# Altium PCB USB_Sniffer.PcbDoc (part 2 of 2)
Units mm, origin at the board's own origin, x right, y up, seen from the top; angles counter-clockwise.
Board outline 50 x 42 mm, 4 copper layers (Top Layer, Int1 (GND), Int2 (GND), Bottom Layer), stack 1.564 mm thick; 83 components, 92 nets, 421 pads, 171 vias.
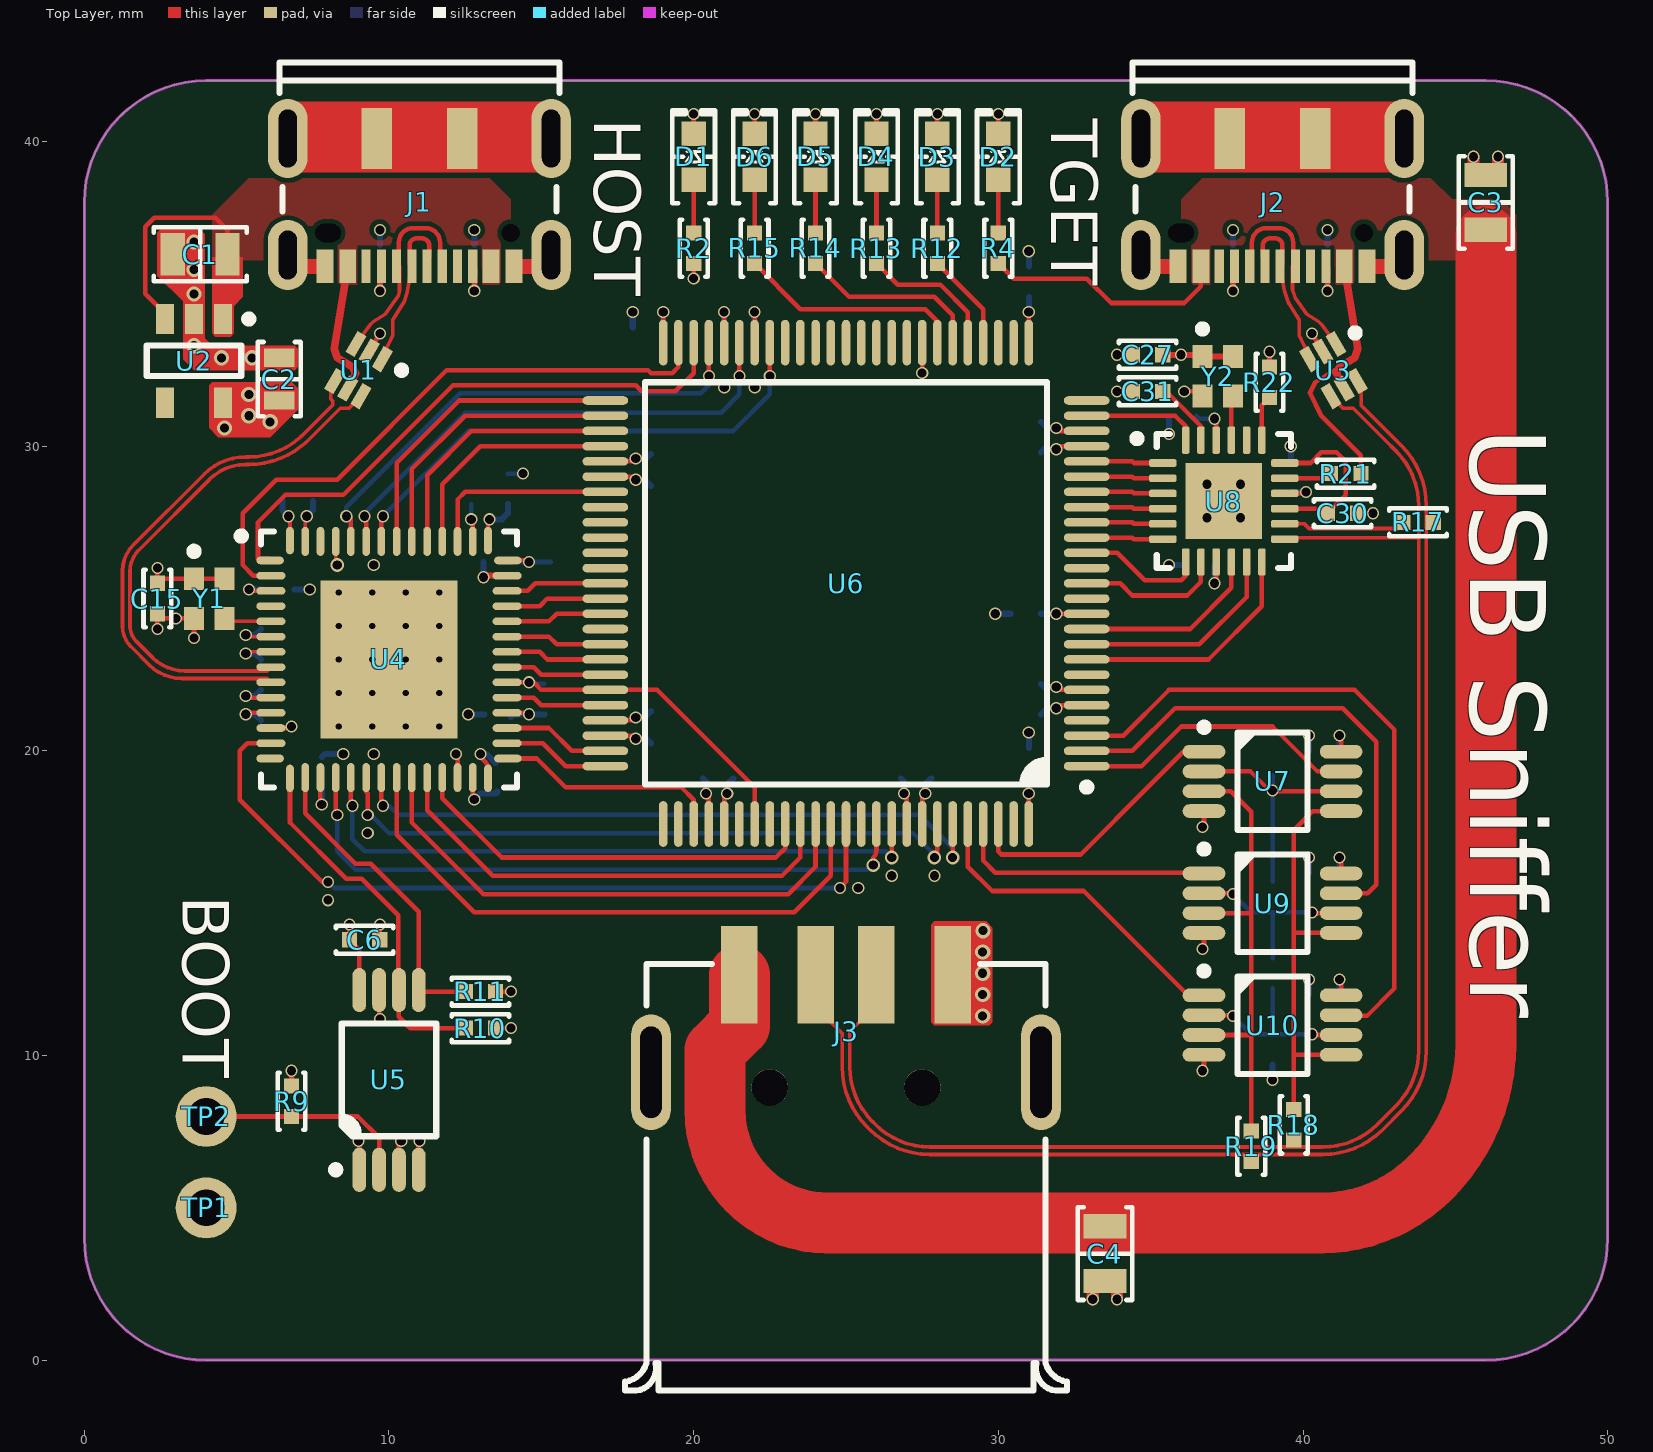
[diagram p0: Top Layer view]

## Via types
v1: diameter 0.4, hole 0.3, Top Layer to Bottom Layer, tented both sides, 127 vias
v2: diameter 0.5, hole 0.2, Top Layer to Bottom Layer, 20 vias
v3: diameter 0.5, hole 0.3, Top Layer to Bottom Layer, tented both sides, 15 vias
v4: diameter 0.45, hole 0.3, Top Layer to Bottom Layer, tented both sides, 5 vias
v5: diameter 0.6, hole 0.3, Top Layer to Bottom Layer, 4 vias

## Nets (pads, with @x,y where several pads share a name; then routed paths per layer and width w, separated by ;. In a path a pad name is that pad's centre, name@x,y a point inside that pad or via, vN(x,y) a via of type N, cw(c..) or ccw(c..) an arc to the next point about the centre after c; other vN are vias at no path point) (continued)
VBUS_T: (continued)
  Top Layer w0.15: R4.1 30.5,35.5 32.9,35.5 33.7,34.7 36.1,34.7 36.65,35.25 J2.11 ; 41.038,32.499 40.4,32.1 40.225,31.75 40.6,31 41.9,29.7 R21.1
  Top Layer w0.25: U3.5 41.1,32.4 41.2,32.6 41.7,32.9 41.8,33.2 J2.2
  Top Layer w2: J3.1 21.5,10.975 20.7,10.175 20.7,8.2 ccw(c24.4,8.2) 24.4,4.5 40.569,4.5 ccw(c40.569,9.619) 44.188,5.999 ccw(c39.815,10.373) 46,10.373 C3.2@46,36.9
pads on no net: J1.4 J1.10 J1.M J2.4 J2.10 J2.M J3.MH1 J3.MH2 U2.4 U4.4 U4.14 U4.54 U6.4 U6.7 U6.12 U6.14 U6.25 U6.27 U6.28 U6.34 U6.35 U6.36 U6.37 U6.38 U6.39 U6.40 U6.41 U6.42 U6.58 U6.59 U6.60 U6.61 U6.62 U6.66 U6.76 U6.77 U6.81 U6.83 U6.89 U6.99 U8.20

## Polygon pours and split planes (outlines as drawn)
GND on Int1 (GND) "GND_L02_P000" (solid, remove dead copper, pour order 0): 0,42 0,0 50,0 50,42
GND on Int2 (GND) "GND_L03_P001" (solid, remove dead copper, pour order 1): 0,42 0,0 50,0 50,42
VBUS_T on Top Layer "VBUS_T_L01_P003" (solid, pour order 3): 41.6,35.3 42.4,36.1 46.6,36.1 47,36.5 47,37.6 46.5,38.1 44.9,38.1 44.2,38.8 36.7,38.8 36,38.1 36,35.7 36.4,35.3
VBUS_H on Top Layer "VBUS_H_L01_P002" (solid, pour order 2): 8.4,35.3 7.6,36.1 4.2,36.1 4.2,37.6 5.4,38.8 13.3,38.8 14,38.1 14,35.7 13.6,35.3
3.3V on Bottom Layer "3.3V_L04_P004" (solid, remove dead copper, pour order 4): 1,37 1,5 ccw(c5,5) 5,1 45,1 ccw(c45,5) 49,5 49,37 ccw(c45,37) 45,41 5,41 ccw(c5,37)

## Keep-outs
Keep-Out Layer:
  the board outline again, w0.1

## Other copper
Top Layer:
  region net GND: 34.7,41.3 43.3,41.3 43.3,39 34.7,39
  region net GND: 6.7,41.3 15.3,41.3 15.3,39 6.7,39
  region net GND: 27.9,14.4 27.8,14.3 27.8,11.1 27.9,11 29.7,11 29.8,11.1 29.8,14.2 29.6,14.4
  region net 3.3V: 4.1,32 4.2,32.1 6.8,32.1 7,31.9 7,31.2 6.1,30.3 4.4,30.3 4.1,30.6
  region net GND: 2.5,37.1 2.4,37 2.4,35.6 3.25,34.75 3.25,32.85 3.6,32.5 6.9,32.5 7,32.6 7,33.2 6.9,33.3 4.2,33.3 3.95,33.55 3.95,36.95 3.8,37.1
  region net VBUS_H: 4.2,36.2 5.2,36.2 5.2,34.9 4.9,34.6 4.9,33.7 4.8,33.6 4.3,33.6 4.2,33.7
Int1 (GND):
  pour cut-out: 42,18.275 42,17.775 40.375,17.775 39.9,17.3 39.9,14.35 39.975,14.275 42,14.275 42,13.775 39.95,13.775 39.9,13.725 39.9,10.35 39.975,10.275 42,10.275 42,9.775 39.95,9.775 39.9,9.725 39.9,8.7 40,8.6 40,7.925 39.4,7.925 39.4,8.625 39.5,8.725 39.5,17.5 40.275,18.275
  pour cut-out: 36,18.925 36,18.425 37.575,18.425 38.1,17.9 38.1,15 38.025,14.925 36,14.925 36,14.425 38.05,14.425 38.1,14.375 38.1,11 38.025,10.925 36,10.925 36,10.425 38.05,10.425 38.1,10.375 38.1,8 38,7.9 38,7.225 38.6,7.225 38.6,7.9 38.5,8 38.5,8.1 38.5,18.1 37.675,18.925

## Silkscreen, mask and mechanical layers (free items; w line width, h text height)
Top Overlay:
  text "HOST" at 16.738,40.746 h1.52 r270
  text "TGET" at 31.738,40.746 h1.52 r270
  text "USB Sniffer" at 45.491,30.6 h2.5 r270
  text "BOOT" at 3.238,15.246 h1.52 r270
Mechanical 1:
  the board outline again, w0.1
Board:
  lines w0.127: -119.925,-33.665 -114.845,-33.665 ; -119.925,14.595 -114.845,14.595 ; -119.925,62.855 -114.845,62.855 ; -46.9,-81.925 -46.9,-76.845 ; -46.9,106.035 -46.9,111.115 ; 26.125,-81.925 26.125,-76.845 ; 26.125,106.035 26.125,111.115 ; 52.795,-69.225 167.095,-69.225 ; 52.795,-61.605 167.095,-61.605 ; 52.795,-53.985 90.895,-53.985 ; 90.895,-76.845 90.895,-61.605 90.895,-46.365 ; 99.15,-81.925 99.15,-76.845 ; 99.15,106.035 99.15,111.115 ; 144.235,-76.845 144.235,-61.605 ; 167.095,-33.665 172.175,-33.665 ; 167.095,14.595 172.175,14.595 ; 167.095,62.855 172.175,62.855 ; 90.895,-46.365 52.795,-46.365 52.795,-76.845 167.095,-76.845 ; 90.895,-46.365 167.095,-46.365 167.095,-76.845 ; 167.095,-76.845 -114.845,-76.845 -114.845,106.035 167.095,106.035 167.095,-76.845 ; -119.925,-81.925 172.175,-81.925 172.175,111.115 -119.925,111.115 -119.925,-81.925
  text "1" at -83.679,107.686 h1.78
  text "2" at -11.035,107.686 h1.78
  text "3" at 62.117,107.686 h1.78
  text "4" at 135.015,107.686 h1.78
  text "A" at -118.02,84.674 h1.78
  text "A" at 169,84.674 h1.78
  text "B" at -118.02,36.617 h1.78
  text "B" at 169,36.617 h1.78
  text "C" at -118.02,-11.897 h1.78
  text "C" at 169,-11.897 h1.78
  text "AUTHOR:" at 54.065,-48.905 h1.14
  text "TITLE:" at 92.165,-48.905 h1.14
  text "LAYER:" at 54.065,-56.398 h1.14
  text "D" at -118.02,-59.903 h1.78
  text "D" at 169,-59.903 h1.78
  text "DATE:" at 54.065,-64.145 h1.14
  text "PART NO.:" at 92.165,-64.145 h1.14
  text "REV:" at 145.505,-64.145 h1.14
  text ".PRINT_DATE" at 55.335,-67.193 h1.78
  text "FILE NAME:" at 54.065,-71.765 h1.14
  text "DWG NO:" at 92.165,-71.765 h1.14
  text "SCALE:" at 145.505,-71.765 h1.14
  text ".PCB_FILE_NAME_NO_PATH" at 55.335,-74.813 h1.78
  text "1" at -83.679,-80.274 h1.78
  text "2" at -11.035,-80.274 h1.78
  text "3" at 62.117,-80.274 h1.78
  text "4" at 135.015,-80.274 h1.78

## Text inside footprints (layer, text, board x,y; h text height)
J3: Mechanical 2 "PCB Edge" at 22.8,-2.2 h0.81